# Altium PCB PCB.PcbDoc
Units mil, origin at the board's own origin, x right, y up, seen from the top; angles counter-clockwise.
Board outline 1771.65 x 3922.88 mil, 2 copper layers (Top Layer, Bottom Layer); 78 components, 50 nets, 231 pads, 71 vias.
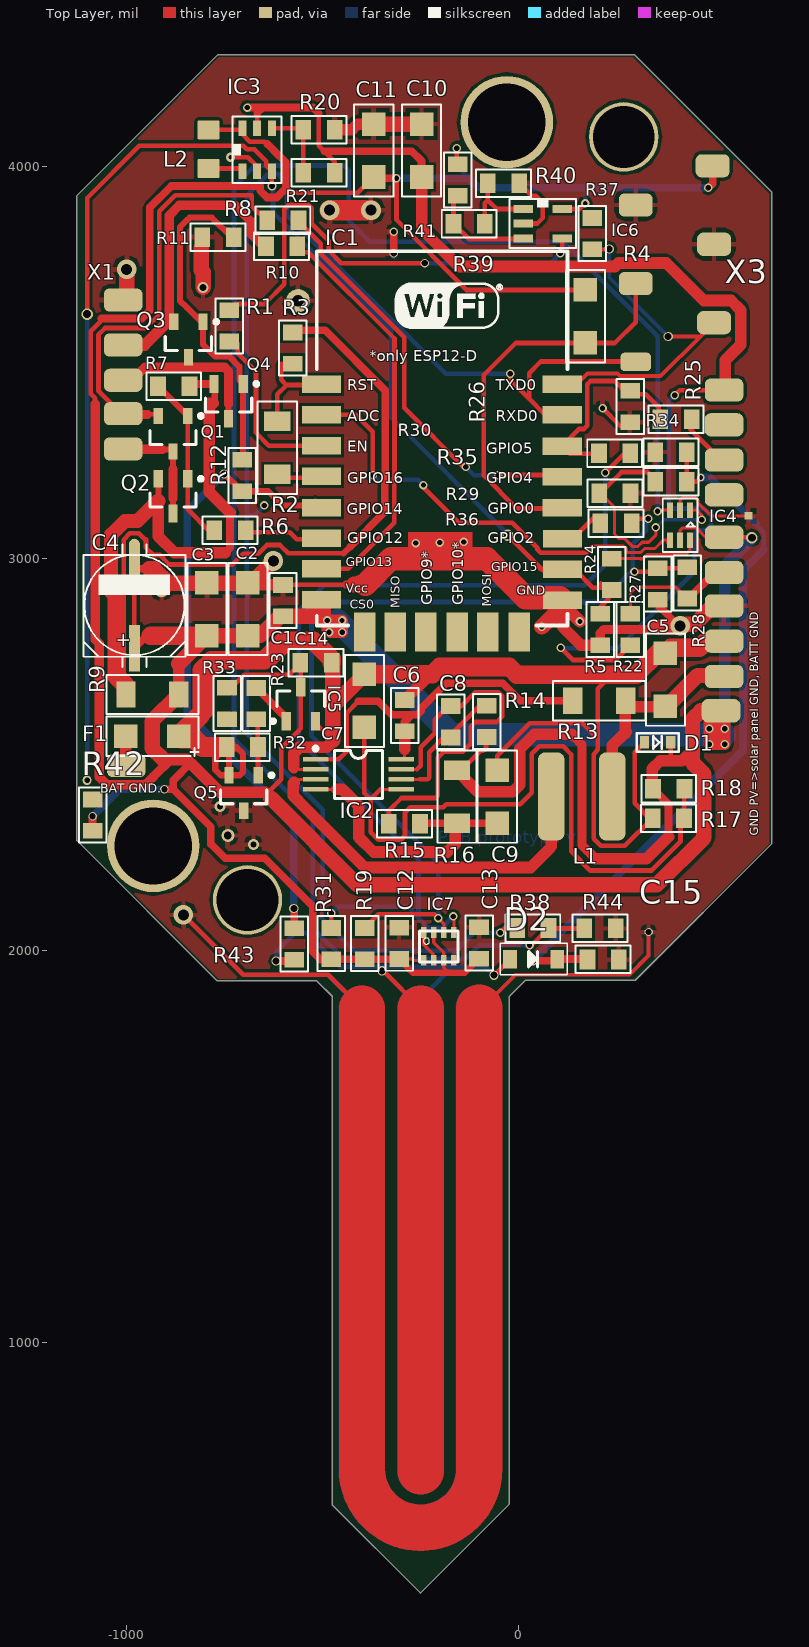
[diagram p0: Top Layer view]
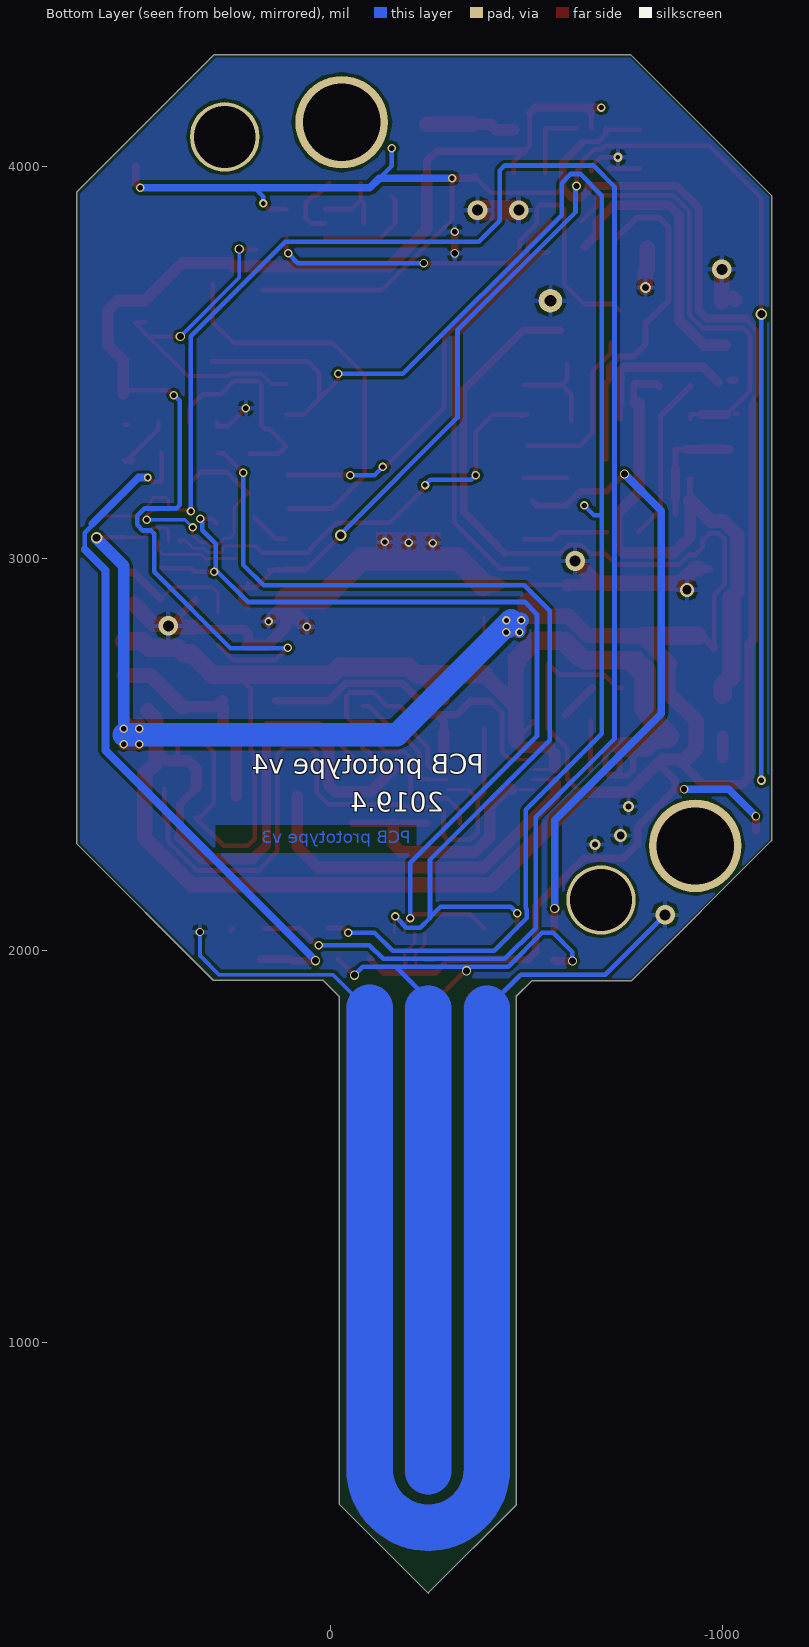
[diagram p1: Bottom Layer view, seen from below]

## Layer stack, top to bottom
Top Layer: signal copper 1.4
Dielectric: dielectric 12.6, FR-4, Dk 4.8
Bottom Layer: signal copper 1.4

## Board outline
-1125.98,2281.34 -767.87,1923.23 -514.23,1923.23 -475,1884 -475,587 -250,362 -23,589 -23,1884 18.2,1925.2 298.19,1925.2 645.67,2272.68 645.67,3936.02 296.81,4284.88 -767.32,4284.88 -1125.98,3926.22

## Design rules (kind name [scope] priority, off if disabled: settings)
Clearance [All] p1: gap=7.87
ComponentClearance [All] p1: gap=10 collisioncheckmode=3 verticalgap=10 showdistances=TRUE
HoleSize [All] p1: absolutevalues=TRUE maxlimit=244.09 minlimit=9.84 maxpercent=80.000 minpercent=20.000
HoleToHoleClearance [All] p1: gap=20 allowstackedmicrovias=TRUE
MinimumAnnularRing [All] p1: minimumring=3
MinimumSolderMaskSliver [All] p1: minsoldermaskwidth=3.78
PlaneConnect [All] p1: planeconnectstyle=Relief reliefexpansion=20 reliefentries=4 reliefconductorwidth=19.68 reliefairgap=10
PolygonConnect [All] p1: connectstyle=Relief reliefconductorwidth=11.81 reliefentries=4 polygonreliefangle="90 Angle" airgapwidth=10
RoutingCorners [All] p1: cornerstyle=45-Degree minsetback=5.91 maxsetback=196.85
RoutingVias [All] p1: holewidth=17.72 width=23.62 viastyle="Through Hole" minholewidth=15.75 minwidth=21.65 maxholewidth=236.22 maxwidth=242.13
SMDNeckDown [All] p1: percent=75.000
ShortCircuit [All] p1 off: allowed=FALSE
SilkToSilkClearance [All] p1 off: silktosilkclearance=3.94
SilkToSolderMaskClearance SilkToSolderMaskClearance_1 [IsPad] p1 off: minsilkscreentomaskgap=10 clearancetoexposedcopper=TRUE
SolderMaskExpansion [All] p1: expansion=4
Width [All] p1: maxlimit=236.22 minlimit=7.87 preferedwidth=29.53
19 further rules are at their usual default settings.

## Classes and differential pairs
net class "Voltage Booster": +5V GND GPIO15 NetIC3_1 NetIC3_4 VCC
net class SPV1040: "GND PV." NetC6_1 NetC7_1 NetC8_1 NetC8_2 NetC9_2 NetIC2_3 PV. VCC
net class H-Bridge: GND MOTOR_CONTROL1/PWM MOTOR_CONTROL2 MOTOR_SENSOR1 MOTOR_SENSOR2 NetQ1_1 NetQ1_2 NetQ1_3 NetQ2_2 NetQ3_1 NetQ3_2 NetQ3_3 VCC
net class ESP8266: ADC DELAYED_RESET EN FLOWMETER GND "GND PV." GPIO15 MOTOR_CONTROL1/PWM MOTOR_CONTROL2 MOTOR_SENSOR1 MOTOR_SENSOR2 NetIC1_1 NetIC1_3 NetIC1_4 NetIC1_17 NetIC1_18 NetIC1_22 RXD/VCC SCL SDA/DHT VCC
component class Schematic: C1 C2 C3 C4 C5 C6 C7 C8 C9 C10 C11 C14 D1 IC1 IC2 IC3 ICx L1 L2 R1 R2 R3 R4 R5 R13 R14 R15 R16 R17 R18 R20 R21 R33 R35 R36 R37 X3
component class Sheet1: Q1 Q2 Q3 Q4 R6 R7 R8 R9 R10 R11 R12 X1
component class Sheet2: C12 C13 C15 D2 F1 IC4 IC5 IC6 IC7 Q5 R19 R22 R23 R24 R25 R26 R27 R28 R29 R30 R31 R32 R34 R38 R39 R40 R41 R42 R43 R44

## Components (designator, comment, footprint, x,y, rotation, side; value= is the part's Value field where it differs from the comment)
C1 "1nF" 0805C-TBD -600.39,2863.19 r90 top
C2 "100nf" 1206C-GENERIC -689.96,2804.13 r90 top
C3 "22uF" 1206C-GENERIC -794.29,2804.13 r90 top
C4 "470uF" PANACAP-D-GENERIC -979.33,2881.89 r90 top
C5 "22uF" 1206C-GENERIC 375,2624.02 r90 top
C6 "1nF" 0805C-TBD -290.35,2569.88 r90 top
C7 "1nF" 1206C-GENERIC -392.72,2569.88 r90 top
C8 "1uF" 0805C-TBD -172.24,2614.17 r270 top
C9 "22uF" 1206C-GENERIC -54.13,2460.63 r270 top
C10 "10uF" 1206C-GENERIC -247.05,3973.55 r90 top
C11 "22uF" 1206C-GENERIC -369.09,3973.55 r90 top
C12 "1nF" 0805C-GENERIC -304.13,1989.17 r90 top
C13 "100nF" 0805C-GENERIC -100.39,1990.16 r90 top
C14 "22uF" 0805C-GENERIC -546.26,2734.25 r0 top
C15 "2u2" 0805C-GENERIC 186,1978 r0 top
D1 "DIODE-TRANSIL-GENERIC" SOD523 388.78,2531.5 r180 top
D2 "1N5819 SOD123" sod-123 99,1979 r180 top
F1 "" Fuse_1206 -811.02,2660.43 r180 top
IC1 "ESP8266 ESP-12-E" "ESP8266 ESP-12-E" 150.59,2799.21 r0 top
IC2 "SPV1040" SPV1040 -618.11,2625 r270 top
IC3 "MCP1624" SOT23-6 -703.74,3993.24 r90 top
IC4 "FSA3157" SC70-6 437.99,3124.02 r180 top
IC5 "TC54VN2702ECB713" SOT-23A-CB3_L -555,2629 r90 top
IC6 "MAX6433-MAX6435" SOT23-5 12,3892 r0 top
IC7 "BMP280" BMP280 -144.69,1961.61 r90 top
L1 "INDUCTOR" "Inductor 6x6mm" 239.17,2393.7 r180 top
L2 "INDUCTOR" INDM2520X190N -790.35,4044.42 r90 top
Q1 "BSS806N" INF-PG-SOT23_N -880.91,3318.9 r270 top
Q2 "IRLML6401" Micro3_N -880.91,3159.45 r270 top
Q3 "BSS806N" INF-PG-SOT23_N -841.54,3559.06 r270 top
Q4 "IRLML2246" Micro3_N -739.17,3401.57 r270 top
Q5 "IRLML6244" INF-PG-SOT23_N -700.79,2402.56 r270 top
R1 "4.7K" 0805R-10K#1 -737.2,3633.86 r270 top
R2 "0 vagy talan 1K?" 1206FB-50Z -615.16,3350.39 r270 top
R3 "10K" 0805R-10K#1 -576,3577 r270 top
R4 "10K" 1206C-GENERIC 171,3551 r90 top
R5 "10K" 0805R-10K#1 208.66,2779.53 r90 top
R6 "390R" 0805R-390 -705.71,3072.83 r180 top
R7 "10K" 0805R-10K#1 -839,3440 r180 top
R8 "1K" 0805R-1K -570.87,3863.19 r180 top
R9 "1R" 1206FB-50Z -1000.98,2653.54 r0 top
R10 "1K" 0805R-1K -633.86,3797.24 r0 top
R11 "10K" 0805R-10K#2 -736,3820 r180 top
R12 "390R" 0805R-390 -704.72,3242.13 r270 top
R13 "1K" 1206FB-50Z 138.78,2637.8 r0 top
R14 "1K" 0805R-1K -80.71,2555.12 r90 top
R15 "1K" 0805R-1K -260.83,2323.82 r180 top
R16 "530m" 1206FB-50Z -156.5,2460.63 r270 top
R17 "200k" 0805R-680K 412.4,2338.58 r180 top
R18 "360k" 0805R-680K 353.35,2413.39 r0 top
R19 "4K7" 0805R-4K7 -391.73,2048.23 r270 top
R20 "261k" 0805R-820K -538.39,4094.49 r0 top
R21 "820k" 0805R-560K -538.39,3984.25 r0 top
R22 "4K7" 0805R-4K7 285.43,2789.37 r90 top
R23 "470R" 0805R-470 -668.31,2660.43 r270 top
R24 "390R" 0805R-390 238.19,2930.12 r90 top
R25 "2k2" 0805R-4K7 372,3356 r0 top
R26 "4k7" 0805R-4K7 285,3358 r90 top
R27 "3k3" 0805R-4K7 355.31,2905.51 r90 top
R28 "2k2" 0805R-4K7 430.12,2968.5 r270 top
R29 "100k" 0805R-100 276,3167 r180 top
R30 "220k" 0805R-100 419,3196 r180 top
R31 "4K7" 0805R-4K7 -477.36,2048.23 r270 top
R32 "150K" 0805R-150K -674.21,2519.68 r180 top
R33 "10K" 0805R-10K#1 -743.11,2590.55 r90 top
R34 "510k" 0805R-100 359,3272 r0 top
R35 "22R" 0805R-22 275.59,3268.7 r180 top
R36 "22R" 0805R-22 279,3090 r180 top
R37 "10k" 0805R-22 188,3799 r90 top
R38 "8k2 1%" 0805R-4K7 6.73,2058.07 r0 top
R39 "931K" 0805R-TBD -155,3936 r90 top
R40 "237K" 0805R-TBD -67.91,3957.68 r0 top
R41 "22K" 0805R-TBD -155.51,3854.33 r0 top
R42 "0" 0805R-TBD -1086,2316 r90 top
R43 "100k" 0805R-100 -571.85,2047.24 r270 top
R44 "2k2 1%" 0805R-1K 238.19,2057.09 r180 top
X1 "Component_1" Szelep_csati -1058.07,3250 r0 top
X3 "X?" "program port" 299.21,3501.97 r0 top

## Footprints (in the part's own frame and the unit in brackets; to place one, negate y for a bottom-side part, rotate by r counter-clockwise, add the part's x,y. Pads: shape width x height; smd on the part's side, far side on the other; paste and mask are expansions set on the pad)
0805C-GENERIC [mil] "CAPACITOR 0805"
  rect 40x50 smd: 1(-10,0) 2(70,0)
  silkscreen extent -40,-35 100,35, body extent -11,-25 70,25, height 26
0805C-TBD [mil] "CAPACITOR 0805"
  rect 40x50 smd: 1(-10,0) 2(70,0)
  silkscreen extent -40,-35 100,35, body extent -11,-25 70,25, height 26
0805R-1K [mil] "RESISTOR 0805"
  rect 40x50 smd: 1(-10,0) 2(70,0)
  silkscreen extent -40,-35 100,35, body extent -11,-25 70,25, height 27
0805R-4K7 [mil] "RESISTOR 0805"
  rect 40x50 smd: 1(-10,0) 2(70,0)
  silkscreen extent -40,-35 100,35, body extent -11,-25 70,25, height 27
0805R-10K#1 [mil] "RESISTOR 0805"
  rect 40x50 smd: 1(0,0) 2(80,0)
  silkscreen extent -30,-35 110,35, body extent -1,-25 80,25, height 27
0805R-10K#2 [mil] "RESISTOR 0805"
  rect 40x50 smd: 1(-10,0) 2(70,0)
  silkscreen extent -40,-35 100,35, body extent -11,-25 70,25, height 27
0805R-22 [mil] "RESISTOR 0805"
  rect 40x50 smd: 1(-10,0) 2(70,0)
  silkscreen extent -40,-35 100,35, body extent -11,-25 70,25, height 27
0805R-100 [mil] "RESISTOR 0805"
  rect 40x50 smd: 1(-10,0) 2(70,0)
  silkscreen extent -40,-35 100,35, body extent -11,-25 70,25, height 27
0805R-150K [mil] "RESISTOR 0805"
  rect 40x50 smd: 1(-10,0) 2(70,0)
  silkscreen extent -40,-35 100,35, body extent -11,-25 70,25, height 27
0805R-390 [mil] "RESISTOR 0805"
  rect 40x50 smd: 1(-10,0) 2(70,0)
  silkscreen extent -40,-35 100,35, body extent -11,-25 70,25, height 27
0805R-470 [mil] "RESISTOR 0805"
  rect 40x50 smd: 1(-10,0) 2(70,0)
  silkscreen extent -40,-35 100,35, body extent -11,-25 70,25, height 27
0805R-560K [mil] "RESISTOR 0805"
  rect 40x50 smd: 1(-10,0) 2(70,0)
  silkscreen extent -40,-35 100,35, body extent -11,-25 70,25, height 27
0805R-680K [mil] "RESISTOR 0805"
  rect 40x50 smd: 1(-10,0) 2(70,0)
  silkscreen extent -40,-35 100,35, body extent -11,-25 70,25, height 27
0805R-820K [mil] "RESISTOR 0805"
  rect 40x50 smd: 1(-10,0) 2(70,0)
  silkscreen extent -40,-35 100,35, body extent -11,-25 70,25, height 27
0805R-TBD [mil] "RESISTOR 0805 VALUE TO BE DETERMINED"
  rect 40x50 smd: 1(-10,0) 2(70,0)
  silkscreen extent -40,-35 100,35, body extent -11,-25 70,25, height 27
1206C-GENERIC [mil] "Polarized Capacitor (Radial); 2 Leads"
  rect 60x60 smd: 1(0,0) 2(135,0)
  silkscreen extent -50,-50 185,50, body extent -8,-29 147,29, height 46
1206FB-50Z [mm] "FERRITE BEAD 1206"
  rect 1.25x1.7 smd: 1(0,0) 2(3.429,0)
  silkscreen extent -1.27,-1.27 4.7,1.27, body extent 0.11,-0.81 3.31,0.8, height 0.84
BMP280 [mm]
  rect 0.7x0.35 smd: 1(2.156,2.458) 2(2.156,1.808) 3(2.156,1.158) 4(2.156,0.508) 5(0.358,0.501) 6(0.358,1.164) 7(0.358,1.814) 8(0.358,2.464)
  silkscreen extent 0.25,0.23 2.25,2.73
"ESP8266 ESP-12-E" [mil] "ESP8266 ESP-12-E"
  rect 100x45 smd: 1(-653,646) 2(-653,568) 3(-653,489) 4(-653,411) 5(-653,331) 6(-653,253) 7(-653,175) 8(-653,96) 15(-38,95) 16(-38,174) 17(-38,252) 18(-39,331) 19(-39,410) 20(-39,488) 21(-39,568) 22(-39,646)
  rect 55x100 smd: 9(-543,14) 10(-465,14) 11(-387,14) 12(-307,14) 13(-229,14) 14(-149,14)
  silkscreen extent -665,30 -25,985, body extent -661,37 -31,981, height 86
Fuse_1206 [mil]
  rect 60x60 smd: 1(55,113) 2(190,113)
  silkscreen extent 5,63 240,163
INDM2520X190N [mm] "Inductor, molded body 2.5x2.0mm"
  round 0.508 on Mech15: 0(0,0)
  rrect20% 1.25x1.45 smd: 1(-1.25,0) 2(1.25,0)
  Top Layer pour cut-out: -0.7,1 0.7,1 0.7,-1 -0.7,-1
  body extent -1.25,-1 1.25,1, height 1.79
"Inductor 6x6mm" [mm]
  rrect50% 1.7x5.7 smd: 1(0,0) 2(3.95,0)
INF-PG-SOT23_N [mm] "SOT23, 3-Leads, Body 2.9x1.3mm, Pitch 0.95mm, IPC Medium Density"
  rect 1.05x0.6 smd: 1(-1.15,0.95) 2(-1.15,-0.95) 3(1.15,0)
  silkscreen extent -1.27,-1.5 0.7,1.93, body extent -0.7,-1.5 0.7,1.5, height 1.1
Micro3_N [mm] "SOT23, 3-Leads, Body 2.9x1.3mm, Pitch 0.95mm, Lead Span 2.3mm, IPC Medium Density"
  rect 1.15x0.6 smd: 1(-1.125,0.95) 2(-1.125,-0.95) 3(1.125,0)
  silkscreen extent -1.25,-1.5 0.7,1.93, body extent -0.7,-1.5 0.7,1.5, height 1.12
PANACAP-D-GENERIC [mm] "Radial Cap, Thru-Hole; 2 Leads; 0.3 in Pin Spacing"
  rect 3x0.7 smd: +(-2.794,0)
  oval 3x0.7 smd: -(2.794,0)
  silkscreen extent -4,-3.3 3.93,3.3, body extent -3.5,-3.3 3.5,3.3, height 5.4
"program port" [mm]
  rrect50% 2x1.2 smd: 1(0,0)
  rrect50% 2.2x1.5 smd: 2(5.08,2.54) 3(0,5.08) 4(5.08,7.62) 5(0,10.16) 6(4.98,12.7)
SC70-6 [mm]
  rect 0.4x1 smd mask+0.05: 1(0,0) 2(0.65,0) 3(1.3,0) 4(1.3,1.95) 5(0.65,1.95) 6(0,1.95)
  silkscreen extent -0.48,-0.75 1.78,2.7, body extent -0.48,0 1.78,1.96, height 1.04
SOD523 [mm]
  rect 0.6x0.8 smd: A(1.7,0) K(0,0)
  silkscreen extent -0.5,-0.6 2.2,0.6, body extent -0.05,-0.53 1.75,0.55, height 0.53
sod-123 [mm]
  rect 0.9x1.2 smd: A(3.048,0) K(0,0)
  silkscreen extent -0.64,-1.02 3.68,1.02, body extent -0.18,-0.87 3.3,0.87, height 0.79
SOT23-5 [mil]
  rect 50x20 smd: 1(0,0) 2(0,-37) 3(0,-75) 4(100,-75) 5(100,0)
  silkscreen extent -35,-100 135,25, body extent 2,-95 98,20, height 52
SOT23-6 [mil]
  rect 40x20 smd: 1(-5,0) 2(-5,-37) 3(-5,-75) 4(105,-75) 5(104.41,-37.4) 6(105,0)
  silkscreen extent -35,-100 135,25, body extent 2,-95 98,20, height 52
SOT-23A-CB3_L [mm] "SOT346, 3-Leads, Body 2.9x1.5mm, Pitch 0.95mm, Lead Span 2.6mm, IPC High Density"
  rect 1.2x0.6 smd: 1(-1.1,0.95) 2(-1.1,-0.95) 3(1.1,0)
  silkscreen extent -1.22,-1.55 0.85,1.92, body extent -0.85,-1.55 0.85,1.55, height 1.45
SPV1040 [mm] "SOT346, 3-Leads, Body 2.9x1.5mm, Pitch 0.95mm, Lead Span 2.6mm, IPC High Density"
  rect 0.3x1.65 smd: 1(3.47,2.559) 2(4.12,2.559) 3(4.77,2.559) 4(5.42,2.559) 5(5.42,8.109) 6(4.77,8.109) 7(4.12,8.109) 8(3.47,8.109)
  silkscreen extent 2.65,2.43 5.99,6.88
Szelep_csati [mm]
  rrect50% 2.5x1.5 smd: "1 - Fekete"(1.27,10.414) "2 - Zöld"(1.27,7.493) "3 - Kék"(1.27,5.207) "4 - Piros"(1.27,3.048) "5 - Sárga"(1.27,0.762)

## Part data
C1 C6: library part 0805C-100nF-25V-X7R-MUR, "CAPACITOR 0805 CERAMIC"
C2 C3 C5 C7 C9 C10 C11: library part 1206C-10U-35V-X7R, "GENERIC CAPACITOR NON POLARISED 1206"
C4: library part C+47U-6V3, "GENERIC CAPACITOR POLARISED"
C8: library part 0805C-TBD, "CAPACITOR 0805 CERAMIC VALUE TO BE DETERMINED"
C12: library part C0805-GENERIC, "100nF"
C13: library part C0805-GENERIC
C14: library part C0805-GENERIC, "GENERIC CAPACITOR NON POLARISED0603"
C15: library part 0805C-2U2-6V3-X5R-PAN, "CAPACITOR 0805 CERAMIC"
D1: "GENERIC TRANSIL"
D2: library part BZT52C5V6, "DIODE / DIODE-B"
F1: library part Fuse
IC3: library part MCP1623
IC5: "1µA Voltage Detector, Open-Drain Output, 2.7V, 3-Pin SOT-23A, Industrial Temperature, Tape and Reel"
Q1 Q3: "N-Channel OptiMOS 2 Small-Signal-Transistor, 20 V VDS, 2.3 A ID, -55 to 150 degC, PG-SOT23, Reel, Green"
Q2: "HEXFET Power MOSFET"
Q4: library part IRLML6401, "HEXFET Power MOSFET"
Q5: library part BSS806N, "N-Channel OptiMOS 2 Small-Signal-Transistor, 20 V VDS, 2.3 A ID, -55 to 150 degC, PG-SOT23, Reel, Green"
R1 R3 R4 R5 R7 R11 R33: library part 0805R-10K, "RESISTOR 0805 1/4 WATT THIN FILM"
R2 R9 R13 R16: library part 0805R-1R, "RESISTOR 0805 1/3 WATT"
R6 R12 R24: library part 0805R-390, "RESISTOR 0805 1/4 WATT THIN FILM"
R8 R10 R14 R15 R44: library part 0805R-1K, "RESISTOR 0805 1/4 WATT THIN FILM"
R17 R18: library part 0805R-680K, "RESISTOR 0805 1/4 WATT THIN FILM"
R19 R22 R25 R26 R27 R28 R31 R38: library part 0805R-4K7, "RESISTOR 0805 1/4 WATT THIN FILM"
R20: library part 0805R-820K, "RESISTOR 0805 1/4 WATT THIN FILM"
R21: library part 0805R-560K, "RESISTOR 0805 1/4 WATT THIN FILM"
R23: library part 0805R-470, "RESISTOR 0805 1/4 WATT THIN FILM"
R29 R30 R34 R43: library part 0805R-100, "RESISTOR 0805 1/4 WATT THIN FILM"
R32: library part 0805R-150K, "RESISTOR 0805 1/4 WATT THIN FILM"
R35 R36 R37: library part 0805R-22, "RESISTOR 0805 1/4 WATT THIN FILM"
R39 R40 R41 R42: library part 0805R-TBD, "RESISTOR 0805 VALUE TO BE DETERMINED"
X1: library part szelep_csati1
X3: library part "program port"

## Free pads (board coordinates)
  round 236.22 hole 196.85: 0(-931.1,2267.72) 1(-29.53,4113.19)
  rect 19.68x19.68 smd: 0(586.61,3109.25)
  rrect50% 98.43x59.06 smd: 1(524.61,3430.12) 2(524.61,3341.54) 3(524.61,3251.54) 4(524.61,3162.95) 5(524.61,3054.68) 6(524.61,2964.68) 7(524.61,2879.68) 8(524.61,2789.68) 9(524.61,2699.68) 9(524.61,2699.68) 10(516.73,2612.2) 11(-1000,2472.44)
  round 60 hole 30: 2(-562,3658)
  round 177.17 hole 157.48: 2(268.7,4075.79) 3(-690.94,2129.92)

## Via types
v1: diameter 21.65, hole 13.78, Top Layer to Bottom Layer, 39 vias
v2: diameter 23.62, hole 17.72, Top Layer to Bottom Layer, 8 vias
v3: diameter 50, hole 28, Top Layer to Bottom Layer, 6 vias
v4: diameter 21.65, hole 15.75, Top Layer to Bottom Layer, 5 vias
v5: diameter 29.53, hole 19.68, Top Layer to Bottom Layer, 3 vias
v6: diameter 27.56, hole 15.75, Top Layer to Bottom Layer, 2 vias
v7: diameter 33.46, hole 19.68, Top Layer to Bottom Layer, 1 vias
v8: diameter 23.62, hole 11.81, Top Layer to Bottom Layer, 1 vias
v9: diameter 27.56, hole 17.72, Top Layer to Bottom Layer, 1 vias
v10: diameter 23.62, hole 15.75, Top Layer to Bottom Layer, 1 vias
v11: diameter 35.43, hole 23.62, Top Layer to Bottom Layer, 1 vias
v12: diameter 21.65, hole 11.81, Top Layer to Bottom Layer, 1 vias
v13: diameter 19.68, hole 11.81, Top Layer to Bottom Layer, 1 vias
v14: diameter 23.62, hole 13.78, Top Layer to Bottom Layer, 1 vias

## Nets (pads, with @x,y where several pads share a name; then routed paths per layer and width w, separated by ;. In a path a pad name is that pad's centre, name@x,y a point inside that pad or via, vN(x,y) a via of type N, cw(c..) or ccw(c..) an arc to the next point about the centre after c; other vN are vias at no path point)
+5V: C10.1 IC3.5 pad.1@524.61,3430.12 R21.2 R22.1 | length 3329.3
  Top Layer w11.81: IC3.5 -666.34,4136.94 ; -508.89,4135.85 -508.89,4053.18 -495.08,4039.37 -468.39,4012.68 R21.2 ; v1(108.27,2772.64) 139.09,2741.81 247.87,2741.81 R22.1 ; v1(398.62,3417.32) 411.42,3430.12 518.7,3430.12 pad.1@527.56,3421.26
  Top Layer w19.68: v1(-691.8,4150.72) -652.56,4150.72 ; -666.34,4136.94 -652.56,4150.72 ; -508.89,4135.85 -523.75,4150.72 -652.56,4150.72 ; -495.08,4039.37 -271.87,4039.37 -247.05,4014.55 C10.1
  Top Layer w29.53: C10.1 -247.05,3840.77 -150.57,3744.29 -149.6,3745.26 246.31,3745.26 255.18,3754.13 376.87,3754.13 472.54,3658.46 542.32,3658.46 566.93,3633.86 566.93,3545.28 527.56,3505.91 pad.1@527.56,3421.26
  Bottom Layer w11.81: v1@108.27,2771.65 253.94,2771.65 448.82,2966.54 448.82,3063.98 456.69,3071.85 477.71,3071.85 492.13,3086.26 492.13,3109.6 473.77,3127.95 392.72,3127.95 383.71,3136.96 383.71,3402.41 v1(398.62,3417.32)
ADC: IC1.2 IC4.4 | length 1175.8
  Top Layer w7.87: 189.72,3031.93 268.08,3031.93 275,3025.01 275,3015.87 311.7,3015.87 321.89,3026.06 348.3,3026.06 369.48,3047.24 IC4.4 IC4.4@379.92,3040.35
  Top Layer w11.81: IC1.2 IC1.2@-483.55,3367.21 ; IC1.2@-494.09,3364.17 -486.59,3364.17 IC1.2@-483.55,3367.21 ; v1(-371.06,3212.6) -371.06,3323.82 -414.46,3367.21 IC1.2@-483.55,3367.21 ; v1(-242.13,3187.99) -244.1,3186.02 -247.05,3186.02 -152.56,3091.54 -15.74,3091.54 48.81,3026.99 48.81,3023.01 56.88,3014.93 172.72,3014.93 189.72,3031.93
  Bottom Layer w11.81: v1@-368.11,3219.49 -373.05,3214.55 -360.27,3201.77 -255.91,3201.77 v1(-242.13,3187.99)
DELAYED_RESET: R33.1
EN: IC6.4 R1.1 | length 1217.2
  Top Layer w11.81: R1.1 -727.09,3643.98 -721.46,3649.61 -647.64,3649.61 -597.64,3699.61 -597.64,3890.9 -586.57,3901.97 -535.16,3901.97 -527.09,3893.9 -527.09,3878.38 -527.09,3854.26 -484.13,3811.3 -484.13,3786.13 -452,3754 v4(-239,3754) ; v1(107.1,3778.73) 112,3783.63 IC6.4
  Bottom Layer w11.81: v4(-239,3754) 82.37,3754 v1(107.1,3778.73)
FLOWMETER: IC1.20 R25.1 R26.2 R35.2 | length 544.8
  Top Layer w11.81: R35.2@204.72,3267.72 131.09,3267.72 IC1.20 155.31,3330.93 167.3,3330.93 175.79,3339.42 175.79,3445.16 183.86,3453.23 245.27,3453.23 279.09,3419.41 288.39,3419.41 324.68,3419.41 358.11,3385.98 R25.1@358.11,3347.44
GND: "X1.1 - Fekete" C1.2 C2.2 C3.2 C4.- C10.2 C11.2 C12.2 C13.2 C15.2 IC1.15 IC3.2 IC4.2 IC6.2 IC7.1 IC7.5 IC7.7 pad.0@586.61,3109.25 pad.2@-562,3658 pad.7 Q5.3 R5.1 R11.2 R20.2 R26.1 R27.1 R29.1 R34.1 R40.2 R44.1 X3.4 X3.5 | length 11164.1
  Top Layer w7.87: IC7.1@-241.46,2045.51 -241.46,2015.08 -216.09,1989.72 IC7.7@-216.09,1974.72 ; IC7.7@-219.05,1965.88 IC7.7@-219.05,1977.91 ; IC4.2 412.4,3148.65 420.26,3156.51 449.76,3156.51 457.68,3148.59 457.68,3143.09 491.51,3109.25 pad.0@585.63,3109.25
  Top Layer w10: -100,1855 -91,1855 -7,1939 283,1939 332,1988 v4(332,2048)
  Top Layer w11.81: v3(-854.33,2091.54) -701.8,1939 -485,1939 -399,1853 ; v8(-734,4024) -690.02,4024 -666.74,4000.72 IC3.2 ; C1.2@-600.39,2934.06 -439.96,2934.06 ; R40.2 33.76,3926 44,3926 62,3908 62,3869 48,3855 IC6.2 ; v1(214.57,3383.86) 259.84,3338.58 287.4,3338.58 R26.1@287.4,3346.61 ; R44.1 R44.1@252.83,2052.44
  Top Layer w19.68: C4.-@-966.3,2974.17 -941.18,2974.17 ; -439.96,2934.06 -420.28,2934.06 ; v4(-318,3779) v1(-318,3834) ; R27.1@343.5,2893.7 360.08,2877.13 407.97,2829.23 408.46,2828.74 v3@416.34,2828.74
  Top Layer w23.62: R5.1 208.66,2810.03 218,2819.37 341.02,2819.37
  Top Layer w29.53: C2.2@-696.85,2937.99 -692.91,2934.06 -604.33,2934.06 C1.2@-604.33,2931.1 ; R20.2 -424.21,4094.49 -410.15,4108.55 C11.2 ; IC1.15@70.93,2900.61 IC1.15@74.89,2896.65 ; IC1.15 112.59,2879.54 112.59,2826.39 159.45,2779.53 R5.1 R5.1@210.63,2779.53
  Top Layer w31.5: IC1.15@117.46,2879.54 v1(157,2840)
  Top Layer w39.37: -1032.68,3660 -1028.74,3663.94 ; -999.02,3653.54 v3(-999.02,3738.19) ; -941.18,2974.17 -928.9,2974.17 -892.72,2937.99 ; v11(-910,2920.71) -892.72,2937.99 ; -808.35,3791.34 -808.35,3735.51 -804.13,3731.3 v9(-804.13,3691.93) ; C3.2@-795.28,2937.99 -892.72,2937.99 ; C3.2@-794.29,2937.99 C2.2@-696.85,2937.99 ; C2.2 -679.96,2939.13 v3(-625,2994.09) ; -420.28,2934.06 -419.29,2935.04 -403.63,2935.04 ; v3(-375.98,3888.78) -375,3888.78 v3@-374.02,3889.76 ; C11.2@-364.46,4108.55 C10.2 ; v1(59.44,2826.39) IC1.15@112.59,2879.54 ; 348.43,2825.79 404.53,2825.79 407.97,2829.23 411.42,2832.68 449.08,2832.68 pad.7@500.26,2883.86
  Top Layer w47.24: -403.63,2935.04 -389.96,2935.04
  Top Layer w51.18: v3(-481.3,3888.78) v3(-375.98,3888.78)
  Top Layer w59.06: -389.96,2935.04 -325,3000 -80.62,3000 18.76,2900.61 70.93,2900.61 106.19,2900.61 IC1.15
  Top Layer w118.11: -399.02,678.39 ccw(c-249.41,678.39) -99.81,678.39 ; -399,678.39 -399,1853 ; -100,678.39 -100,1855
  Bottom Layer w10: -101,1855 -91,1855 -7,1939 283,1939 332,1988 v4(332,2048)
  Bottom Layer w11.81: v3(-854.33,2091.54) -701.8,1939 -486,1939 -400,1853
  Bottom Layer w19.68: v4@-318,3774 v4(-318,3779)
  Bottom Layer w39.37: v3(-625,2994.09) v3@-624.02,2995.08 ; v3@-625,2996.06 v3@-624.02,2995.08 ; v3@-620.08,2999.02 v3@-624.02,2995.08
  Bottom Layer w118.11: -400.02,678.39 ccw(c-250.41,678.39) -100.81,678.39 ; -400,678.39 -400,1853 ; -101,678.39 -101,1855
  other v1: -262,3040 -200.79,3041.34 -139.57,3042.68
  other v3: 412.65,2828.88
  other v6: -676,2271 -761,2368
  other v7: -741.14,2294.29
"GND PV.": C5.2 C6.2 C7.2 C9.1 C14.2 D1.A F1.1 IC2.2 IC5.2 pad.8 Q5.2 R17.2 R32.2 | length 4332.3
  Top Layer w7.87: -572.05,2462.8 IC2.2
  Top Layer w11.81: IC5.2 -517.6,2581.1 -473.9,2537.4 ; C9.1 -54.13,2497.56 29.01,2580.71 61.02,2580.71 163.39,2580.71 202.76,2541.34 ; 240.16,2705.71 238.86,2704.41 202.76,2668.31 202.76,2541.34 ; D1.A 296.26,2505.91 296.26,2375.98 333.66,2338.58 R17.2 271.54,2267.72 209.8,2267.72 191.93,2285.59 191.93,2501.81 202.76,2512.64 202.76,2541.34
  Top Layer w15.75: Q5.2@-738.19,2459.65 R32.2@-738.19,2513.78 ; -773,2462 -758.83,2447.83 Q5.2 -711.17,2447.83 -702,2457 -702,2502 -719.69,2519.68 R32.2 -773,2490.9 -773,2462
  Top Layer w29.53: -572.83,2467.52 -572.48,2467.87 -572.48,2503.67 -560.04,2516.11 -560.04,2518.9 -489.17,2518.9 -468.98,2539.09 ; -526.57,2795.28 -476.26,2744.96 C14.2@-473.9,2742.6 ; C6.2 -226.38,2703.86
  Top Layer w39.37: -811.85,2601.61 -811.85,2716.98 -784.22,2744.61 -644.95,2744.61 -632.66,2744.61 -586.52,2790.75 -581.99,2795.28 -526.57,2795.28 ; -473.9,2537.4 -473.9,2623.7 ; C14.2@-473.9,2742.6 -473.9,2623.7 ; C7.2 -473.9,2623.7
  Top Layer w47.24: -799.61,2613.85 -799.61,2703.6 -761.59,2741.61 -647.94,2741.61 -644.95,2744.61 -598.8,2790.75 -586.52,2790.75 -523.21,2790.75 -477.43,2744.96 -476.26,2744.96 C14.2 ; C7.2 -220.05,2704.88 -201.08,2723.86 -23.09,2723.86 -3.64,2704.41 238.86,2704.41 300.01,2704.41 354.62,2759.02 C5.2 ; C5.2@388.37,2772.38 461.17,2772.38 478.47,2789.68 pad.8
  Top Layer w51.18: -811.85,2601.61 F1.1 -859.65,2541.06 -827.18,2541.06 -805.81,2519.68 R32.2
GPIO15: IC1.16 IC3.3 R5.2 R24.1 | length 3707.2
  Top Layer w11.81: v5(-1100,3624) -1100,3920 -967,4053 -701.8,4053 -692.98,4044.18 -673.2,4044.18 -642.96,4013.94 -642.96,4002.46 IC3.3 v10(-628.74,3950.79) ; v5(-27,3060) 58.59,2974.41 ; 55.12,2974.41 58.59,2974.41 ; IC1.16@115.16,2973.21 142.93,2973.21 IC1.16@145.67,2970.47 ; IC1.16@115.16,2974.41 58.59,2974.41 ; IC1.16@156.5,2970.47 IC1.16@145.67,2970.47 ; R5.2@208.66,2875.98 228.35,2895.67 R24.1@228.35,2926.18 ; 209.65,2926.85 208.66,2926.85 ; 209.65,2936.85 208.66,2935.87 208.66,2926.85 ; R24.1@228.35,2927.01 R24.1@228.35,2926.18 ; R24.1@229.33,2926.18 R24.1@228.35,2926.18 ; 58.59,2974.41 62.53,2970.47 IC1.16@145.67,2970.47 ; IC1.16@145.67,2970.47 189.96,2926.18 208.66,2926.18 ; 208.66,2926.18 R24.1@228.35,2926.18 ; 208.66,2926.18 208.66,2926.85
  Bottom Layer w11.81: v14(-1100,2435) v5(-1100,3624) ; v10(-628.74,3950.79) -625.98,3948.03 -625.98,3883.86 -324.8,3582.68 -324.8,3360.24 v5@-25.78,3061.22
MOTOR_CONTROL1/PWM: IC1.5 R12.2 R43.1 | length 1582.2
  Top Layer w7.87: v2(-751,3216) v2@-748.6,3216
  Top Layer w15.75: v2@-748.6,3216 R12.2 ; R12.2@-706.17,3172.13 R12.2 ; IC1.5@-517.72,3145.52 -527.24,3136 -602,3136 -638.13,3172.13 R12.2
  Top Layer w19.68: v2(-572.83,2107.83) -571.85,2106.85 R43.1
  Bottom Layer w19.68: v2(-751,3216) -844.49,3122.51 -844.49,2604.33 -572.83,2332.68 v2(-572.83,2107.83)
MOTOR_CONTROL2: IC1.6 R6.1 | length 219.2
  Top Layer w11.81: R6.1@-705.55,3067.91 -583.66,3067.91 -564.96,3049.21 IC1.6@-494.09,3049.21
MOTOR_SENSOR1: IC1.7 R10.2 | length 1036.7
  Top Layer w11.81: R10.2@-556.97,3781.5 -535.79,3781.5 -315.94,3561.65 -315.94,3197.88 -316.93,3196.9 -316.93,3091.54 -434.25,2974.21 IC1.7
MOTOR_SENSOR2: IC1.19 R8.1 | length 1057.9
  Top Layer w11.81: R8.1@-561.89,3861.22 -503.82,3803.15 -503.82,3777.37 -291.34,3564.89 -291.34,3384.5 -140.84,3234 v1(-134,3234) ; v1@-50.2,3213.58 IC1.19@107.22,3213.58
  Bottom Layer w11.81: v1(-134,3234) -113.19,3213.19 -113.19,3212.76 v1(-51.02,3212.76)
"NEDVESSEGMéRõ ELEKTRóDáRA": D2.A R43.2 | length 3407.2
  Top Layer w11.81: v2(-348,1949) -345,1949 -249,1853 ; v2(-62,1938) D2.A
  Top Layer w19.68: v2(-618,1974) R43.2@-575.09,1974 ; R43.2@-576.09,1973 R43.2@-575.09,1974 ; R43.2@-570.87,1976.26 R43.2 R43.2@-575.09,1974
  Top Layer w118.11: -249,673 -249,1853
  Bottom Layer w11.81: v2(-618,1974) -618,1997 -569,2046 -540.37,2046 -454.02,1959.65 -358.65,1959.65 ; v2(-348,1949) -358.65,1959.65 ; -250,1853 -250,1876.65 -167,1959.65 ; v2(-62,1938) -83.65,1959.65 -167,1959.65 ; -358.65,1959.65 -167,1959.65
  Bottom Layer w118.11: -250,673 -250,1853
NetC6_1: C6.1 IC2.1 IC2.8 R13.1 | length 969.7
  Top Layer w7.87: IC2.1 -478.54,2488.39 ; IC2.8@-297.24,2488.19 -290.35,2495.08 -290.35,2513.78
  Top Layer w11.81: -478.54,2488.39 -457.87,2488.39 ; -457.68,2488.19 -438.46,2507.4 -438.46,2606.4 -408.06,2636.81
  Top Layer w19.68: -407.98,2636.73 -357.26,2636.73 -322.69,2602.17 -271.85,2602.17 ; C6.1 -290.35,2583.66 -271.85,2602.17 ; R13.1 4.51,2637.8 -40.22,2682.52 -183.95,2682.52 -247.64,2618.83 -247.64,2612.54 -258.02,2602.17 -271.85,2602.17
  Top Layer w29.53: -290.35,2513.78 C6.1
NetC7_1: C7.1 IC2.5 R17.1 R18.2 | length 1795.1
  Top Layer w7.87: -352.36,2411.42 IC2.5@-299.21,2411.42
  Top Layer w11.81: C7.1@-392.72,2566.93 -392.72,2402.56 -376.97,2386.81 ; -352.36,2411.42 -376.97,2386.81 ; R17.1 413.23,2329.41 413.23,2278.7 339.25,2204.72 183.71,2204.72 134.84,2253.59 134.84,2500.66 113.85,2521.65 53.48,2521.65 34.45,2502.63 34.45,2403.54 4.92,2374.02 -184.06,2374.02 -192.09,2365.98 -275.93,2365.98 -289.37,2352.55 -289.37,2293.31 -300.2,2282.48 -300.79,2283.07 -357.35,2283.07 -376.97,2302.69 -376.97,2386.81 ; R17.1@423.35,2337.72 R18.2
NetC8_1: C8.1 IC2.7 R15.2 | length 943.1
  Top Layer w7.87: IC2.7 -258.66,2462.8 -257.68,2462.8
  Top Layer w11.81: R15.2 -330.83,2357.17 -298.23,2389.76 -211.61,2389.76 -205.71,2395.67 -205.71,2491.76 -189.04,2508.43 -140.72,2508.43 -121.46,2527.69 -121.46,2571.64 -109.44,2583.66 -54.89,2583.66 -41.93,2596.63 -41.93,2650.83 -50,2658.9 -111.42,2658.9 -146.14,2624.17 C8.1 ; -258.66,2462.8 -249.02,2472.44 -249.02,2519.09 -212.99,2555.12 ; -212.99,2556.1 -213.58,2555.51 -213.58,2589.57 C8.1@-179.13,2624.02 ; C8.1@-177.17,2625 C8.1@-176.18,2624.02
NetC8_2: C8.2 IC2.6 R14.2 | length 336.5
  Top Layer w7.87: IC2.6 -251.18,2437.2
  Top Layer w11.81: -251.18,2437.2 -231.1,2437.2 -227.36,2440.94 -227.36,2506.89 -189.96,2544.29 C8.2@-172.24,2544.29 ; C8.2 C8.2@-172.24,2544.29 ; R14.2@-82.68,2624.02 -99.7,2624.02 -172.24,2551.48 C8.2@-172.24,2544.29
NetC9_2: C9.2 IC2.4 R15.1 R16.2 | length 723.6
  Top Layer w7.87: IC2.4@-521.65,2411.42 -462.6,2411.42
  Top Layer w9.84: -448.82,2411.42 -447.83,2410.43
  Top Layer w19.68: R15.1@-247.87,2325.63 R16.2 -59.21,2325.63 C9.2@-58.07,2326.77
  Top Layer w29.53: -462.6,2412.4 -449.8,2412.4 -448.82,2411.42 ; -447.83,2410.43 -407.48,2370.08 -407.48,2290.05 -369.4,2251.97 -182.09,2251.97 -161.42,2272.64 R16.2@-161.42,2323.82
NetC15_1: C15.1 D2.K R30.1 R34.2 | length 1810.3
  Top Layer w11.81: R30.1 R30.1@435,3196 ; R34.2 429,3202 R30.1@435,3196 ; v13(465,3207) 454,3196 R30.1@435,3196
  Top Layer w19.68: v2(37.01,1975) 95,1975 D2.K 175,1979 C15.1
  Bottom Layer w11.81: 608.11,3083.66 625.98,3065.79 625.98,3023.62
  Bottom Layer w19.68: v2(37.01,1975) 572.83,2510.83 572.83,2970.47 625.98,3023.62 ; v13(465,3207) 488.87,3207 606.46,3089.41
NetF1_2: F1.2 pad.11 | length 53.3
  Top Layer w29.53: pad.11@-1001.02,2494.13 F1.2
NetIC1_1: IC1.1 R2.1 R3.2 | length 259.1
  Top Layer w11.81: R2.1@-615.16,3351.38 -615.16,3419.29 -591.54,3442.91 ; -603.35,3496.77 -605.32,3494.8 -605.32,3456.69 -591.54,3442.91 ; IC1.1@-494.09,3442.91 -591.54,3442.91
NetIC1_3: IC1.3 R1.2 | length 431.8
  Top Layer w11.81: R1.2@-718.5,3551.89 -715.55,3548.94 -715.55,3524.32 -669.29,3478.06 -669.29,3320.87 -636.64,3288.21 IC1.3
NetIC1_4: IC1.4 R2.2 | length 111.4
  Top Layer w11.81: R2.2@-605.47,3206.69 IC1.4@-494.09,3206.69
NetIC1_17: IC1.17 R36.2 | length 103.5
  Top Layer w11.81: IC1.17 138.81,3051.21 R36.2@193.43,3105.83
NetIC1_18: IC1.18 R4.1 X3.3 | length 1028.1
  Top Layer w11.81: IC1.18@106.3,3127.95 -3.94,3127.95 -88.58,3212.6 -88.58,3458.66 -88.58,3468.5 -6.89,3550.2 202.76,3550.2 246.06,3550.2 299.21,3603.35 X3.3
NetIC1_22: IC1.22 R37.1 X3.2 | length 898.6
  Top Layer w10: IC1.22 149.29,3445.21 176.08,3472.01 253.05,3472.01 259.59,3465.47 362.72,3465.47 464.05,3566.8 ; R37.1@187,3789 231,3789 v2(231.67,3789.67) ; v2(382,3566.8) 464.05,3566.8 ; X3.2@470.71,3601.97 X3.2 464.05,3566.8
  Bottom Layer w10: v2(231.67,3789.67) 231.67,3717.13 v2(382,3566.8)
NetIC2_3: IC2.3 L1.2 | length 969.4
  Top Layer w7.87: -569.13,2427.21 -559.33,2437.01 IC2.3@-514.76,2437.01
  Top Layer w29.53: -572.04,2430.12 -574.45,2427.71 -574.45,2395.52 -560.04,2381.1 ; -556.99,2378.05 -391.53,2212.6 31.5,2212.6 81.69,2262.8 ; 83.66,2266.73 L1.2
NetIC3_1: IC3.1 L2.1 | length 79.6
  Top Layer w11.81: L2.1 IC3.1@-710.71,3995.2
NetIC3_4: IC3.4 R20.1 R21.1 | length 189.6
  Top Layer w11.81: IC3.4 R20.1@-549.4,4098.24 ; R21.1 R20.1
NetIC4_1: IC4.1 R29.2 R30.2 | length 622.9
  Top Layer w7.87: R29.2@209,3167 245.08,3130.92 245.08,3062.99 256.89,3051.18 271.1,3051.18 290.67,3031.61 305.17,3031.61 315.49,3041.93 332.1,3041.93 350.39,3060.23 v1(350.39,3079.72) ; IC4.1 454.48,3124.02 467.52,3110.97 v1(467.52,3099.41)
  Top Layer w11.81: R29.2@209,3167 263,3221 330,3221 R30.2@355,3196
  Bottom Layer w7.87: v1@350.39,3078.91 v1(350.39,3079.72) 370.08,3099.41 v1(467.52,3099.41) v1@467.52,3096.46
NetIC4_3: IC4.3 R38.2 R44.2 | length 4573.1
  Top Layer w7.87: v1(354.82,3120.57) 358.27,3124.02 IC4.3
  Top Layer w11.81: v1@28.39,2009.01 v1(28.39,2014.65) 33.31,2014.65 R38.2 ; R38.2@87.72,2057.09 R44.2
  Bottom Layer w11.81: v1(28.39,2014.65) 28.39,2009.01 22.99,2014.41 -100.39,2014.41 -135.47,1979.33 -445.87,1979.33 -524.61,2058.07 -524.61,2340.55 -725.39,2541.34 -725.39,3948.82 -671.26,4002.95 -445.87,4002.95 -433.07,3990.16 -433.07,3862.07 -379.07,3808.07 114.17,3808.07 355.31,3566.93 355.31,3121.06 v1(354.82,3120.57)
NetIC4_6: IC4.6 R24.2 | length 232.9
  Top Layer w7.87: R24.2 311.89,3000.12 312.01,3000 318.1,3000 328.41,3010.31 425.67,3010.31 437.99,3022.64 IC4.6@437.99,3046.26
NetIC5_1: IC5.1 R23.1 | length 96
  Top Layer w19.68: R23.1 IC5.1@-600.39,2602.52
NetIC6_1: IC6.1 R40.1 R41.2 | length 205.6
  Top Layer w11.81: R41.2 -85.51,3906.61 -77.91,3914.21 ; R40.1 -77.91,3914.21 ; IC6.1 -55.7,3892 -77.91,3914.21
NetIC6_3: IC6.3 R39.1 R41.1 | length 270.2
  Top Layer w11.81: R39.1 -165.51,3915.49 R41.1 -126.73,3815.55 10.55,3815.55 IC6.3
NetQ1_1: Q1.1 Q2.1 R6.2 R7.2 | length 427
  Top Layer w11.81: Q1.1 -843.5,3125.87 R6.2@-785.55,3067.91
  Top Layer w15.75: R7.2@-919,3439.67 Q1.1
NetQ1_2: "X1.4 - Piros" Q1.2 R8.2 | length 1117.4
  Top Layer w11.81: -1040.04,3370 -1032.68,3370 ; -1015.43,3370 -1012.65,3370 ; -1008.07,3370 -1012.65,3370 ; -945.87,3368.11 -922.24,3368.11 Q1.2@-919.29,3365.16 ; Q1.2@-919.29,3357.28 Q1.2@-919.29,3365.16 ; Q1.2 Q1.2@-919.29,3365.16 ; R8.2@-641.89,3861.22 -679.89,3899.22 -679.89,3926.78 -875.45,3926.78 -916.34,3885.88 -916.34,3622.48 -946.57,3592.24 -950.51,3588.31 -1054.34,3588.31 -1071.06,3571.59 -1071.06,3428.41 -1012.65,3370
  Top Layer w23.62: -1011.81,3368.11 -945.87,3368.11
NetQ1_3: "X1.5 - Sárga" Q1.3 Q2.3 | length 361.2
  Top Layer w15.75: -908.46,3278.54 Q1.3@-879.92,3278.54 ; Q2.3 -880.91,3154.53 ; -880.91,3228.35 Q1.3@-880.91,3270.67 ; Q1.3 Q1.3@-879.92,3273.62
  Top Layer w23.62: -1018.7,3278.54 -908.46,3278.54 ; -1008.07,3280 -942.16,3280 ; -880.91,3154.53 -880.91,3228.35
NetQ2_2: Q2.2 Q4.2 R7.1 R9.1 | length 1448.2
  Top Layer w15.75: Q2.2@-919.29,3202.76 -918.31,3201.77 -918.31,3147.64 ; -777.56,3395.67 -774.61,3398.62 Q4.2@-774.61,3445.87
  Top Layer w19.68: R7.1 -833.13,3445.87 Q4.2 ; -748.03,3015.75 -735.39,3028.39 -735.39,3117.28
  Top Layer w29.53: -918.31,3147.64 -918.31,3056.84 -877.21,3015.75 -748.03,3015.75 ; -778.89,3397 -788,3397 -788,3169.89 -735.39,3117.28
  Top Layer w35.43: -1024.61,2900.02 -1039.37,2914.79 -1039.37,3062.03 -1037.98,3062.03 -1003.79,3096.22 -971.78,3096.22 -920.36,3147.64 -918.31,3147.64
  Top Layer w47.24: -1024.61,2900.02 -1024.61,2699.79 -1000.98,2676.17 R9.1
NetQ3_1: Q3.1 Q4.1 R11.1 R12.1 | length 902.2
  Top Layer w15.75: R11.1@-728.35,3816.93 -781.5,3870.08 -838.58,3870.08 -845.87,3862.8 -863.19,3845.47 -863.19,3658.12 -845.87,3640.8 ; R12.1@-702.76,3253.94 Q4.1@-702.76,3446.85 ; Q4.1 Q4.1@-702.76,3446.85 ; -845.87,3640.8 -845.87,3640.75 -809.45,3604.33 Q3.1@-809.4,3604.33 ; -845.87,3640.8 Q3.1@-809.4,3604.33 ; Q3.1@-809.4,3604.33 Q3.1 -804.13,3546.26 -773.62,3515.75 -737.6,3515.75 -711.61,3489.76 -711.61,3455.71 Q4.1@-702.76,3446.85
NetQ3_2: "X1.2 - Zöld" Q3.2 R10.1 | length 723
  Top Layer w23.62: -894.89,3603.55 -890.75,3607.7 -890.75,3875.28 -864.85,3901.18 -723.43,3901.18 -681.57,3859.33 -681.57,3828.07 R10.1@-650.75,3797.24
  Top Layer w29.53: -1008.07,3545 -953.45,3545 -894.89,3603.55
NetQ3_3: "X1.3 - Kék" Q3.3 Q4.3 | length 404.1
  Top Layer w15.75: Q4.3 -739.17,3394.68
  Top Layer w19.68: -1032.68,3455 -1020.67,3455
  Top Layer w23.62: -990.27,3450.79 -952.47,3488.58 -799.8,3488.58 -799.41,3488.19 -749.02,3488.19 -739.17,3478.35 -739.17,3394.68
NetQ5_1: Q5.1 R23.2 R32.1 | length 122.3
  Top Layer w11.81: R32.1@-664.37,2524.61 R23.2@-664.37,2586.5 ; R32.1 -664.21,2460.47 Q5.1@-663.39,2459.65
NetR22_2: pad.6 R22.2 R28.2 | length 335.1
  Top Layer w7.87: R22.2 285.43,2912.4 300.35,2927.32 401.3,2927.32 R28.2
  Top Layer w19.68: R28.2@433.07,2897.64 500.12,2964.68 pad.6
NetR25_2: pad.3@524.61,3251.54 R25.2 | length 171.3
  Top Layer w11.81: R25.2@438.11,3348.43 438.11,3330.59 pad.3@517.72,3250.98 ; pad.3@500.98,3250.98 pad.3@502.95,3250.98 ; pad.3@508.86,3245.08 pad.3@502.95,3250.98 ; pad.3@522.64,3246.06 pad.3@517.72,3250.98 ; pad.3@526.57,3250.98 pad.3@517.72,3250.98 ; pad.3@502.95,3250.98 pad.3@517.72,3250.98
PV.: C5.1 L1.1 pad.9 R13.2 | length 527.7
  Top Layer w29.53: L1.1 239.17,2523.62 274.61,2559.06 ; 272.64,2553.15 R13.2@272.64,2620.08 ; R13.2 289.53,2622.05 C5.1@367.13,2622.05
  Top Layer w39.37: C5.1@376.97,2622.05 457.05,2702.13 pad.9@524.68,2702.13
RXD/VCC: IC1.21 R38.1 X3.1 | length 4037.6
  Top Layer w11.81: v1(-46.26,2046.26) -34.45,2058.07 R38.1@6.73,2058.07 ; v1(-20.67,3471.46) -20.67,3455.71 27.56,3407.48 ; IC1.21 67.83,3367.21 27.56,3407.48 ; X3.1@302.17,3502.95 57.09,3502.95 27.56,3473.43 27.56,3407.48
  Bottom Layer w11.81: v1(-648.39,3135.83) -672.99,3111.22 -692.91,3111.22 ; v1(-46.26,2046.26) -113.19,2046.26 -159.45,2000 -418.31,2000 -501.97,2083.66 -501.97,2105.79 -499.02,2108.74 -499.02,2359.25 -692.91,2553.15 -692.91,3111.22 ; v1(-20.67,3471.46) -185.74,3471.46 -590.55,3876.26 -590.55,3957.69 -614.16,3981.3 -637.81,3981.3 -692.91,3926.19 -692.91,3111.22
SCL: IC7.4 R31.1 R35.1 | length 2486.3
  Top Layer w7.87: v1@-165.35,2087.6 -166.34,2088.58 v1(-166.34,2087.6) -164.69,2085.94 IC7.4
  Top Layer w11.81: R31.1 v1(-477.36,2095.6) ; v1@-165.35,2087.6 v1@-164.69,2086.93 ; v1(221,3219) 270.7,3268.7 R35.1
  Bottom Layer w11.81: v1(-477.36,2095.6) -460.68,2112.28 -281.58,2112.28 -254.92,2085.63 ; v1@-170.91,2082.68 -194.53,2059.06 -230.32,2059.06 -254.92,2083.66 -254.92,2085.63 ; v1(221,3219) 221,2984 169.09,2932.09 -495.08,2932.09 -560.04,2867.13 -560.04,2537.4 -254.92,2232.28 -254.92,2085.63
SDA/DHT: IC7.3 R19.1 R27.2 R28.1 R36.1 | length 2356.3
  Top Layer w7.87: v1(-204.72,2083.66) -190.28,2069.21 IC7.3
  Top Layer w11.81: R19.1 -357.01,2092.95 -214.02,2092.95 v1(-204.72,2083.66) ; R36.1 301.36,3102.36 v1(331.27,3102.36) ; v1(295.98,2966.54) 346.34,2966.54 R27.2 427.13,2975.51 R28.1
  Bottom Layer w11.81: v1@-204.72,2090.55 -204.72,2224.41 -527.56,2547.24 -527.56,2858.27 -496.06,2889.76 209.93,2889.76 v1@291.34,2971.18 ; v1(295.98,2966.54) v1@291.34,2971.18 ; v1(331.27,3102.36) 325.79,3096.88 325.79,3072.83 291.34,3038.39 v1@291.34,2971.18
VCC: C1.1 C2.1 C3.1 C4.+ C11.1 C12.1 C13.1 C14.1 D1.K IC1.8 IC3.6 IC4.5 IC5.3 IC6.5 IC7.2 IC7.6 IC7.8 L2.2 pad.5 pad.10 R3.1 R4.2 R9.2 R14.1 R16.1 R18.1 R19.2 R31.2 R33.2 R37.2 R39.2 R42.1 X3.6 | length 15326.7
  Top Layer w7.87: C12.1@-290.51,1965.55 C12.1 -269.53,1979.17 -265.75,1975.39 -242,1975.39 IC7.8 ; IC7.2@-215.87,2045.51 -215.87,2020.98 -190.5,1995.62 IC7.6 -190.5,1957.24 -177.17,1943.9 ; IC7.6@-193.46,1965.88 IC7.6@-193.46,1978.89 ; IC4.5@412.4,3044.29 412.4,3072.83 418.31,3078.74 453.22,3078.74 477.28,3054.68 pad.5 ; pad.5@513.22,3054.13 pad.5@526.57,3054.13 ; v5@593.07,3054.68 v5@593.5,3055.12
  Top Layer w11.81: -1079.72,3394.68 -1079.72,3403.67 ; -1078.94,3394.53 -1078.94,3402.88 -1079.72,3403.67 ; -1062.5,3607.99 -1090.75,3579.74 -1090.75,3420.26 -1079.72,3409.24 -1079.72,3403.67 ; C4.+ -979.33,2907.64 -1006.89,2935.2 -1006.89,3048.58 -990.75,3064.72 -967.92,3064.72 -952.59,3049.4 -949.8,3049.4 -949.8,3028.31 -931.1,3009.61 -914.22,3009.61 -889.85,2985.24 -729.33,2985.24 -701.77,3012.8 -663.93,3012.8 -641.88,3034.84 -608.12,3034.84 -587.24,3013.96 -445.89,3013.96 ; -939.96,3626.69 -939.96,3632.96 ; L2.2 IC3.6@-708.35,4093.63 ; R33.2 -732.68,2670.55 -699.01,2704.21 -584.17,2704.21 -556.1,2732.28 -555,2731.18 IC5.3 -555,2567.41 -562.01,2560.41 ; IC3.6 -703.74,4082.78 -684.83,4063.87 -646.54,4063.87 -640.64,4057.96 ; -638.22,2404.53 -605.32,2437.44 -605.32,2517.1 -562.01,2560.41 ; -597.44,3952.76 -593.5,3948.82 -577.76,3933.07 -409.58,3933.07 C11.1 ; -562.01,2560.07 -562.01,2560.41 ; v1(-311.02,3970.47) -311.02,3864.38 -131.84,3685.2 R4.2@171,3685.2 ; v1(-157,4047) -157,4008 R39.2 ; R16.1 -145.63,2460.63 -96.42,2509.84 -89.57,2509.84 -82.68,2516.73 R14.1@-82.68,2545.28 ; IC6.5 156,3892 v12(170,3906) ; 388.78,2500 D1.K ; pad.5 593.07,3054.68 593.94,3054.68 v5(595.47,3053.15)
  Top Layer w15.75: -445.89,3013.96 -429.13,3030.72 -429.13,3032.48 ; R19.2@-393.7,1976.38 R19.2@-368.61,1976.38 ; C12.1@-290.51,1965.55 -268.86,1943.9 -177.17,1943.9 -136.65,1943.9 C13.1
  Top Layer w19.68: R42.1 v4(-1086,2343) ; -1062.5,3611.95 -1063.3,3612.76 -960.17,3612.76 -939.96,3632.96 -939.96,3895.67 -885.23,3950.4 -658.27,3950.4 -658.27,3938.56 -640.97,3921.26 -616.51,3921.26 -598.47,3939.3 -593.5,3939.3 -593.5,3948.82 -593.5,4010.84 -608.75,4026.09 ; C4.+ -948.07,2803.15 ; v4(-903,2412) -880.5,2412 ; -836.61,2478.35 -880.5,2434.46 -880.5,2412 ; -640.64,4057.96 -610.6,4027.92 ; R3.1@-586.61,3582.68 -493.11,3582.68 -339.57,3429.13 -339.57,3207.67 -340.55,3206.68 -340.55,3119.3 -429.13,3030.72 ; R31.2@-484.25,1977.36 -503.94,1977.36 -524.61,1998.03 -524.61,2113.91 -646.91,2236.22 -748.03,2236.22 -784.45,2272.64 -784.45,2315.94 -880.5,2412 ; R31.2@-483.27,1978.35 R19.2@-391.73,1978.35 ; R19.2 -391.43,1978.53 -305.38,1978.53 C12.1@-305.08,1978.23 ; C11.1 -366.02,3970.47 v1(-311.02,3970.47) ; R18.1 382.72,2374.02 382.72,2291.34 ; v1(484.25,3945.87) 495.28,3956.89 X3.6
  Top Layer w23.62: -1078.94,3394.53 -1078.94,2794.1 -1068.9,2784.06 -1068.9,2443.41 -1048.72,2423.23 -951.28,2423.23 -931.1,2443.41 -931.1,2443.9 -887.09,2487.91 ; 139.76,2548.23 162.4,2525.59 162.4,2269.18 196.35,2235.24
  Top Layer w29.53: -905.47,2487.91 -887.09,2487.91 -846.17,2487.91 -836.61,2478.35 -835.63,2478.35 -761.81,2404.53 -646.1,2404.53 -631.33,2389.76 ; -866.14,2735.24 -866.14,2732.28 -866.14,2653.7 R9.2 ; IC1.8@-502.95,2894.68 -544.45,2853.19 -545.28,2852.36 -497.05,2852.36 v1(-487.2,2842.52) ; v1(-449.8,2842.52) v1(-487.2,2842.52) ; v1@-449,2841.72 v1(-449,2812) -479.04,2812 -487.2,2820.16 v1(-487.2,2842.52) ; R16.1@-161.42,2463.58 -103.86,2406.02 -13.94,2406.02 3.94,2423.9 3.94,2515.27 40.84,2552.17 135.83,2552.17 139.76,2548.23 ; 196.35,2235.24 326.61,2235.24 382.72,2291.34 ; R18.1@341.54,2417.32 341.54,2464.57 361.22,2484.25 416.34,2484.25 443.9,2511.81 ; v1@486.22,2563.98 486.22,2551.18 ; 516.73,2580.71 501.97,2565.95 486.22,2581.69 486.22,2551.18 ; pad.10@526.57,2608.27 v1(526.57,2565.95) 526.57,2551.18 ; 486.22,2551.18 526.57,2551.18 ; 486.22,2551.18 v1(486.22,2526.68) v1(526.57,2526.68) 526.57,2551.18
  Top Layer w39.37: -905.47,2487.91 -934,2516.43 -934,2585.84 R9.2@-866.14,2653.7 ; -866.14,2732.28 C3.1@-795.28,2803.15 ; C3.1@-800.2,2806.1 -800.2,2803.15 C3.1@-795.28,2803.15 ; C3.1 C3.1@-795.28,2803.15 ; C2.1 -657.8,2804.13 -608.74,2853.19 C1.1 -544.45,2853.19 -497.87,2853.19 -497.87,2889.61 IC1.8@-502.95,2894.68 ; C2.1@-688.98,2803.15 C3.1@-795.28,2803.15 ; -631.33,2389.76 -409.88,2168.31 352.94,2168.31 352.94,2169.29 353.93,2169.29 472.87,2288.24 472.87,2450.62 443.9,2479.59 443.9,2511.81 443.9,2586.61 ; 445.87,2592.52 465.47,2612.13
  Top Layer w47.24: -937.99,2803.15 C3.1@-800.2,2803.15
  Bottom Layer w11.81: v1(-157,4047) -157,4001.49 -125.98,3970.47 ; -59.06,3943.9 -59.06,3945.87 ; v12(170,3906) 170,3923.87 192,3945.87
  Bottom Layer w19.68: v4(-1086,2343) -1017,2412 v4(-903,2412) ; v1(-311.02,3970.47) -125.98,3970.47 -101.38,3945.87 -59.06,3945.87 192,3945.87 v1(484.25,3945.87)
  Bottom Layer w29.53: v1(-483,2812) -483,2838.31 v1@-456.69,2812 ; 526.57,2551.18 v1(526.57,2565.95) 526.57,2982.28 v5@595.47,3051.18
  Bottom Layer w39.37: v1(-487.2,2842.52) -461.61,2842.52 ; 523.62,2551.18 525.59,2549.21 530.51,2549.21
  Bottom Layer w59.06: -461.61,2842.52 -170.28,2551.18 523.62,2551.18 525.59,2551.18
  other v1: 487.2,2565.95
pads on no net: IC1.9 IC1.10 IC1.11 IC1.12 IC1.13 IC1.14 L2.0 R42.2
copper on no net: | length 44.2
  Top Layer w7.87: -392.72,2815.94 -392.72,2851.31
  Top Layer w11.81: 516.73,3341.54 524.61,3341.54 ; 523.61,3162.95 524.61,3162.95

## Polygon pours and split planes (outlines as drawn)
GND on Bottom Layer "GND" (solid, pour order 5): -1120.61,2283.3 -1120.61,3923.45 -765.88,4278.08 -764.9,4277.1 291.4,4277.1 637.26,3931.33 637.26,2273.45 635.29,2273.45 291.4,1929.66 -766.87,1929.66 -1120.61,2283.3
GND on Top Layer "GND" (solid, remove dead copper, pour order 2): -1119.13,2282.73 -1119.13,3920.61 -1119.13,3923.57 -764.2,4278.35 292.69,4278.35 292.69,4277.36 639.73,3930.47 639.73,2273.86 639.73,2272.87 294.66,1927.95 293.68,1928.94 -764.2,1928.94 -1119.13,2283.71

## Other copper
Top Layer:
  rectangle net VCC: -487.2,2812 -449,2842.52
  rectangle net GND: -281,2991 -117,3068
Bottom Layer:
  rectangle net VCC: -487.2,2812 -449,2842.52
  rectangle net VCC: -449,2812 -440,2815
  text "PCB prototype v3" at -205.71,2274.61 h31.5

## Silkscreen, mask and mechanical layers (free items; w line width, h text height)
Top Overlay:
  text "BAT GND." at -1066.57,2403.24 h23.62
  text "GND PV=>solar panel GND, BATT GND" at 612,2294 h21.65 r90
Bottom Overlay:
  text "PCB prototype v4" at -391.73,2451.77 h49.21
  text "2019.4" at -290.35,2354.33 h49.21
Mechanical 1:
  the board outline again, w15.75

## Text inside footprints (layer, text, board x,y; h text height)
C4: Top Overlay "+" at -992.13,2771.65 h35 r90
IC1: Mechanical 13 "ANTENNA AREA" at -502.37,3759.8 h10; Mechanical 13 "CUTOUT POLYGON" at -502.37,3739.8 h10; Top Overlay "MISO" at -302.17,2874.02 h23.62 r90; Top Overlay "RST" at -436.02,3429.13 h27.56; Top Overlay "ADC" at -436.02,3350.39 h27.56; Top Overlay "EN" at -436.41,3273.21 h27.56; Top Overlay "GPIO16" at -436.02,3192.91 h27.56; Top Overlay "GPIO14" at -437.78,3113.11 h27.56; Top Overlay "GPIO12" at -436.02,3039.37 h27.56; Top Overlay "GPIO13" at -439.96,2980.32 h23.62; Top Overlay "Vcc" at -439.96,2913.39 h23.62; Top Overlay "CS0" at -429.91,2872.95 h23.62; Top Overlay "GPIO9*" at -219.49,2881.89 h27.56 r90; Top Overlay "GPIO10*" at -140.75,2881.89 h27.56 r90; Top Overlay "MOSI" at -69.88,2877.95 h23.62 r90; Top Overlay "GND" at -4.71,2908.39 h23.62; Top Overlay "GPIO15" at -69.88,2968.5 h23.62; Top Overlay "GPIO2" at -77.76,3039.37 h27.56; Top Overlay "GPIO0" at -77.76,3114.17 h27.56; Top Overlay "GPIO4" at -81.69,3192.91 h27.56; Top Overlay "GPIO5" at -81.69,3267.72 h27.56; Top Overlay "RXD0" at -58.07,3350.39 h27.56; Top Overlay "TXD0" at -58.07,3429.13 h27.56; Top Overlay "*only ESP12-D" at -380.91,3503.94 h27.56